# EAGLE board Gimbal Controler V3.0.1 by Martinez (EAGLE 6.3)
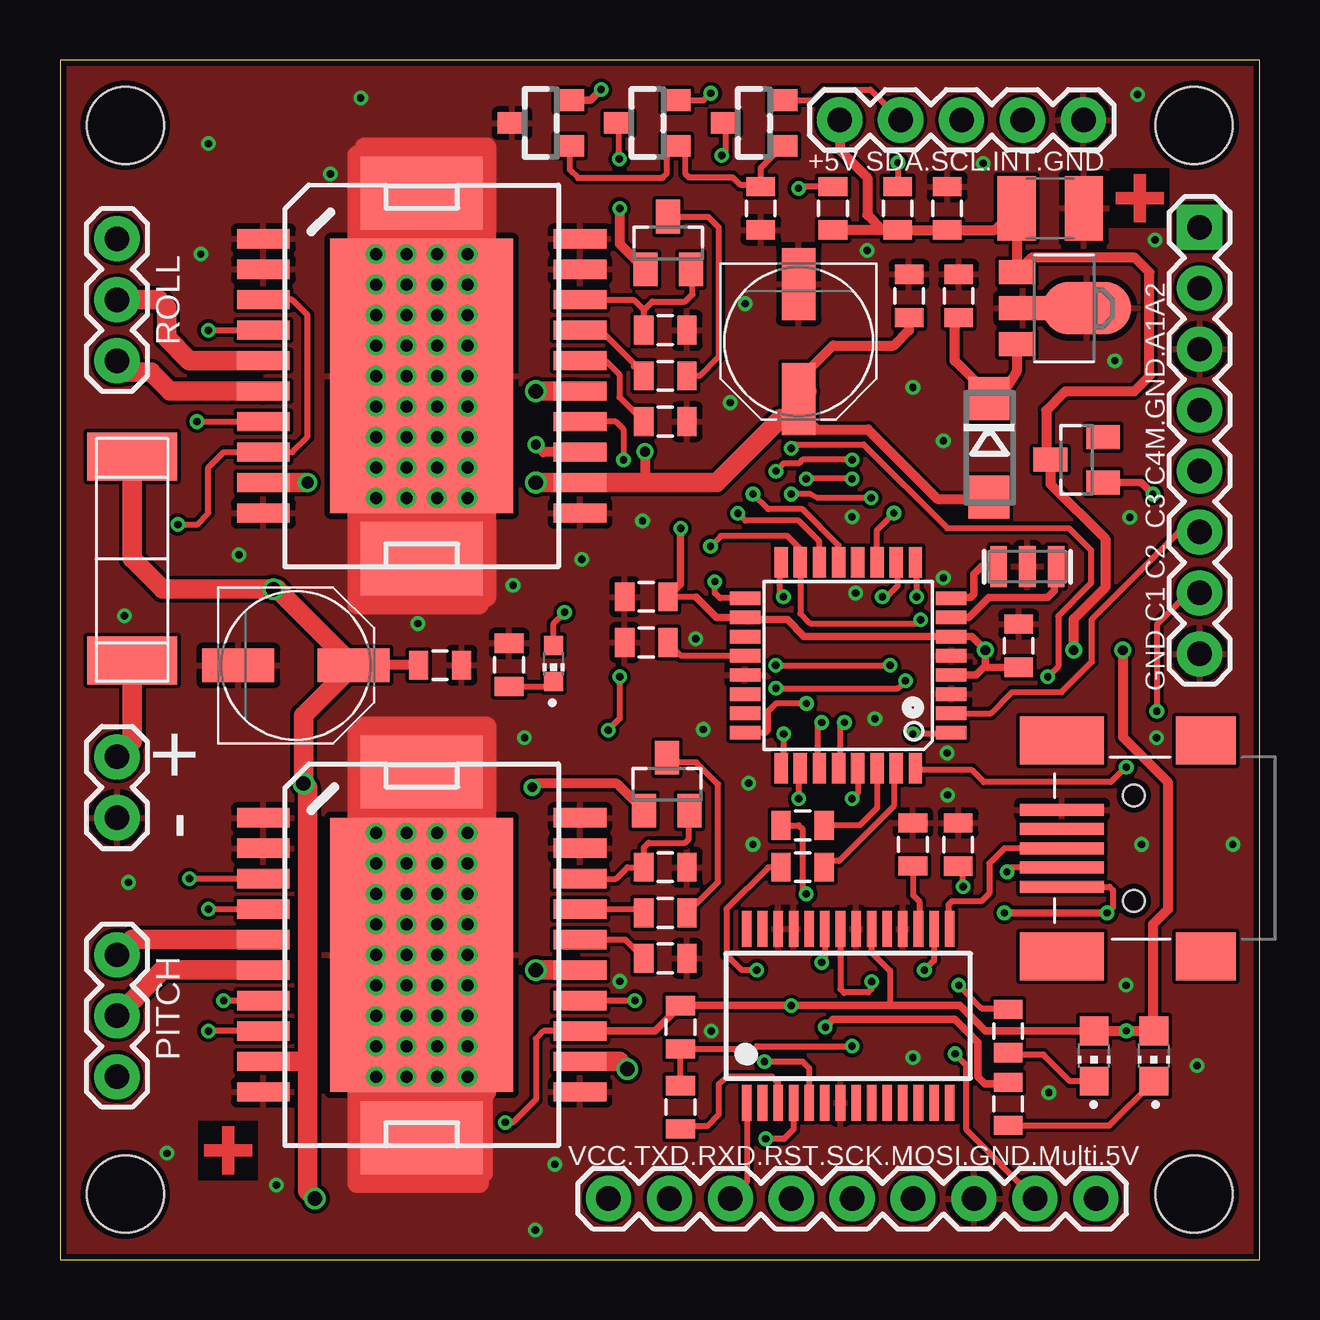
[diagram p0: board, top side]
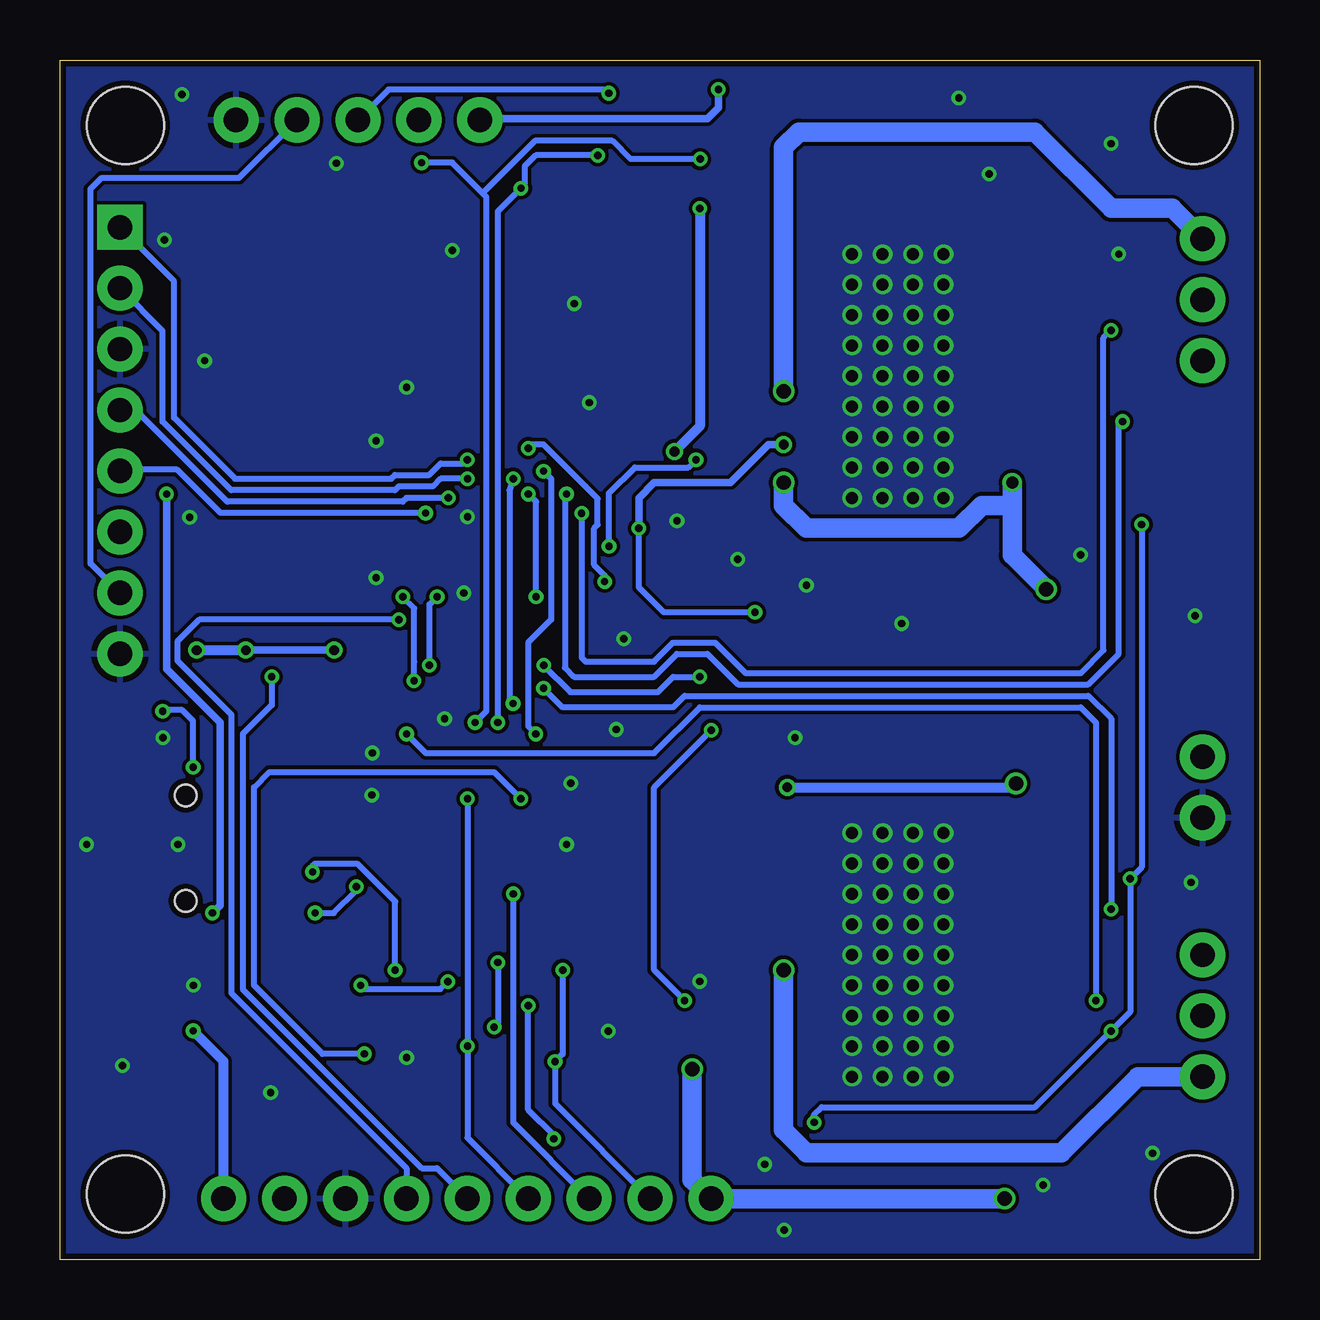
[diagram p1: board, bottom side, seen from below]

Size 50 x 50 mm. Coordinates in mm from the lower left corner, seen from the top.
Outline: 50,0 50,50 0,50 0,0 50,0
Copper layers (1*16): Top 0.035mm / dielectric 1.5mm / Bottom 0.035mm
Design rules "ITEADstudio_DRC *": minimum track width 6mil, minimum drill 12mil, track to track 6mil, track to pad 6mil, pad to pad 6mil, via to via 6mil, smd to smd 0mil, copper to edge 10mil, drill to drill 10mil, minimum pad ring 10mil, minimum via ring 6mil, stop-mask expansion 2mil, vias tented up to drill 100mil, thermal gap 10mil
Net classes: 0 default: width 0.152 mm, clearance 0.152 mm
Holes 3.2 mm at 47.27,2.73 2.73,2.73 2.73,47.27 47.27,47.27
tRestrict: 8 lines

## Footprints (pad centres in the part's own frame; a part is rotated, then mirrored left to right if it is on the bottom)
0805 = smd 0.8 x 1.2: 1 -0.9,0; 2 0.9,0
PANASONIC_D = smd 3 x 1.4: + 2.4,0; - -2.4,0
C1210 = smd 1.6 x 2.7: 1 -1.4,0; 2 1.4,0
TQFP32-08 = smd 1.27 x 0.559: 1 -4.293,2.8; 2 -4.293,2; 3 -4.293,1.2; 4 -4.293,0.4; 5 -4.293,-0.4; 6 -4.293,-1.2; 7 -4.293,-2; 8 -4.293,-2.8; 17 4.293,-2.8; 18 4.293,-2; 19 4.293,-1.2; 20 4.293,-0.4; 21 4.293,0.4; 22 4.293,1.2; 23 4.293,2; 24 4.293,2.8 | smd 0.559 x 1.27: 9 -2.8,-4.293; 10 -2,-4.293; 11 -1.2,-4.293; 12 -0.4,-4.293; 13 0.4,-4.293; 14 1.2,-4.293; 15 2,-4.293; 16 2.8,-4.293; 25 2.8,4.293; 26 2,4.293; 27 1.2,4.293; 28 0.4,4.293; 29 -0.4,4.293; 30 -1.2,4.293; 31 -2,4.293; 32 -2.8,4.293
SSOP28 = smd 0.4 x 1.5: 1 -4.225,-3.625; 2 -3.575,-3.625; 3 -2.925,-3.625; 4 -2.275,-3.625; 5 -1.625,-3.625; 6 -0.975,-3.625; 7 -0.325,-3.625; 8 0.325,-3.625; 9 0.975,-3.625; 10 1.625,-3.625; 11 2.275,-3.625; 12 2.925,-3.625; 13 3.575,-3.625; 14 4.225,-3.625; 15 4.225,3.625; 16 3.575,3.625; 17 2.925,3.625; 18 2.275,3.625; 19 1.625,3.625; 20 0.975,3.625; 21 0.325,3.625; 22 -0.325,3.625; 23 -0.975,3.625; 24 -1.625,3.625; 25 -2.275,3.625; 26 -2.925,3.625; 27 -3.575,3.625; 28 -4.225,3.625
SO20POWER2 = smd 0.8 x 2.2: 1 -5.715,-6.6; 2 -4.445,-6.6; 3 -3.175,-6.6; 4 -1.905,-6.6; 5 -0.635,-6.6; 6 0.635,-6.6; 7 1.905,-6.6; 8 3.175,-6.6; 9 4.445,-6.6; 10 5.715,-6.6; 11 5.715,6.6; 12 4.445,6.6; 13 3.175,6.6; 14 1.905,6.6; 15 0.635,6.6; 16 -0.635,6.6; 17 -1.905,6.6; 18 -3.175,6.6; 19 -4.445,6.6; 20 -5.715,6.6 | smd 3.048 x 5.08: SLUG -7.62,0; SLUG2 7.62,0 | smd 11.43 x 7.62: SLUG1 0,0
SOT23 = smd 1 x 1.4: 1 -0.95,-1.1; 2 0.95,-1.1; 3 0,1.1
SMD_FUSE_10MM = smd 2 x 3.75: P$1 4.25,0; P$2 -4.25,0
SOT23' = smd 0.9 x 1.2: 1 -0.95,-1.2; 2 0.95,-1.2; 3 0,1.2
1X02 = drill 1.016 pad 1.88: 1 0,0; 2 2.54,0
1X05 = drill 1.016 pad 1.88: 1 0,0; 2 2.54,0; 3 5.08,0; 4 7.62,0; 5 10.16,0
1X08 = drill 1.016 pad 1.88 square: 1 0,0 | drill 1.016 pad 1.88: 2 2.54,0; 3 5.08,0; 4 7.62,0; 5 10.16,0; 6 12.7,0; 7 15.24,0; 8 17.78,0
1X09 = drill 1.016 pad 1.88: 1 0,0; 2 2.54,0; 3 5.08,0; 4 7.62,0; 5 10.16,0; 6 12.7,0; 7 15.24,0; 8 17.78,0; 9 20.32,0
1X03 = drill 1.016 pad 1.88: 1 0,0; 2 2.54,0; 3 5.08,0
CHIP-LED0603 = smd 0.8 x 0.8: A 0,-0.75; C 0,0.75
CHIP-LED0805 = smd 1.2 x 1.2: A 0,-1.05; C 0,1.05
DO214AC = smd 1.8 x 1.7: A 2.05,0; C -2.05,0
SOT89 = smd 1 x 1.5: 1 -1.499,-1.981; 3 1.499,-1.981 | smd 1 x 2: 2 0,-1.727 | smd 2.2 x 3.7: 2@1 0,0.94
USB-MINIB-OLD = smd 2.5 x 2: 1 -3,-4.5; 2 -3,4.5 | smd 3.5 x 2: 3 3,-4.5; 4 3,4.5 | smd 3.5 x 0.5: D+ 3,0; D- 3,0.8; GND 3,-1.6; ID 3,-0.8; VBUS 3.01,1.61 | hole 0.9: 0,2.2; 0,-2.2
RESONATOR-SMD = smd 0.7 x 1.7: 1 -1.2,0; 2 0,0; 3 1.2,0

## Placement (x,y rotation side)
C1  100n  [0805]  35.55,17.3 90 top
C2  100n  [0805]  25.87,6.35 270 top
C3  100n  [0805]  36.98,43.81 270 top
C4  100n  [0805]  37.46,40.16 270 top
C5  100n  [0805]  24.44,27.62 180 top
C6  100µ  [PANASONIC_D]  9.84,24.77 0 top
C7  100µ  [PANASONIC_D]  30.79,38.26 270 top
C8  100n  [0805]  39.96,25.58 90 top
C9  47u  [C1210]  41.27,43.81 180 top
C10  100n  [0805]  29.21,43.81 270 top
C11  4.7u  [0805]  37.44,17.3 90 top
C16  1uF  [0805]  25.23,34.92 180 top
C17  1uF  [0805]  25.23,12.55 180 top
C18  10n  [0805]  25.23,14.45 180 top
C19  10n  [0805]  25.23,36.83 180 top
C20  220n  [0805]  25.23,16.35 0 top
C21  220n  [0805]  25.23,38.73 0 top
C24  100n  [0805]  35.4,40.16 90 top
C25  100n  [0805]  15.84,24.77 0 top
C29  100n  [0805]  24.44,25.72 0 top
D1  ATMEGA328p-AU  [TQFP32-08]  32.85,24.77 180 top
D2  FT232RL  [SSOP28]  32.85,10.16 0 top
D3  T1  [SO20POWER2]  15.07,12.7 270 top
D4  T2  [SO20POWER2]  15.07,36.83 270 top
D5  BAV99  [SOT23]  25.35,42.37 0 top
D6  BAV99  [SOT23]  25.3,19.81 0 top
F1  FUSE_SMD_10MM  [SMD_FUSE_10MM]  3.01,29.21 270 top
IC2  LM3480-3.3V  [SOT23']  20.04,47.37 90 top
JP1  [1X02]  2.38,18.41 90 top
JP2  [1X05]  32.5,47.5 0 top
JP3  [1X08]  47.5,43.03 270 top
JP4  M09  [1X09]  43.18,2.54 180 top
JP6  [1X03]  2.38,12.7 270 top
JP7  [1X03]  2.38,37.47 90 top
LED1  Blue LBL293  [CHIP-LED0603]  20.57,24.84 180 top
LED2  LG M67K green  [CHIP-LED0805]  43.1,8.48 180 top
LED3  LG M67K red  [CHIP-LED0805]  45.59,8.48 180 top
Q1  BSS138  [SOT23']  24.49,47.37 90 top
Q2  BSS138  [SOT23']  28.93,47.37 90 top
R1  4,7k  [0805]  32.22,43.81 270 top
R2  4,7k  [0805]  34.92,43.81 270 top
R3  1k  [0805]  30.95,18.1 0 top
R4  330R  [0805]  39.52,6.49 270 top
R5  330R  [0805]  39.52,9.53 270 top
R6  1k  [0805]  30.95,16.35 0 top
R7  220  [0805]  18.72,24.79 270 top
R21  10k  [0805]  25.87,9.68 90 top
V1  [DO214AC]  38.72,33.83 270 top
V2  ZHCS1000  [SOT23]  42.38,33.34 90 top
V7  78L05F  [SOT89]  41.87,39.65 270 top
X2  USBOLD  [USB-MINIB-OLD]  44.76,17.14 180 top
Y7  16mhz  [RESONATOR-SMD]  40.32,28.88 180 top

## Library data of the parts
C1-C8 C10 C11 C16-C21 C24 C25 C29 JP1-JP4 JP6 JP7 R1-R7 R21 X2 Y7 = SparkFun
C9 = rcl
D1 = Arduino-AVR
D2 = ftdichip; MPN: FT232RL; OC_FARNELL: 1146032; OC_NEWARK: 91K9918
D3 D4 = L6234
D5 D6 V1 V2 = diode
F1 = f-lf-omniblok-s
IC2 Q1 Q2 = m-pad-2.1_my
LED1-LED3 = led
V7 = linear

## Nets
3.3V: C10.1 IC2.1 Q1.1 Q2.1
+5V: C3.2 C5.1 C8.1 C9.2 D1.4 D1.6 D1.18 D2.4 D2.20 D3.3 D3.8 D3.13 D4.3 D4.8 D4.13 IC2.2 JP2.1 JP4.1 LED1.A LED2.A LED3.A R1.2 R2.2 R21.2 V2.3 V7.1
A1: D1.24 JP3.2
A2: D1.25 JP3.1
A7: D1.22
CBUS0: D2.23 R4.1
CBUS1: D2.22 R5.1
CH2: D1.2 JP3.6
CH3: D1.11 JP3.5
D0_RXD: D1.30 R3.2
D1_TXD: D1.31 R6.2
DMINUS: D2.16 X2.D-
DPLUS: D2.15 X2.D+
GND: C1.2 C3.1 C4.1 C5.2 C6.- C7.- C8.2 C9.1 C10.2 C11.2 C16.1 C17.1 C20.2 C21.2 C24.2 C25.2 C29.1 D1.3 D1.5 D1.21 D2.7 D2.18 D2.21 D2.25 D2.26 D3.1 D3.2 D3.10 D3.11 D3.19 D3.20 D3.SLUG D3.SLUG1 D3.SLUG2 D4.1 D4.2 D4.10 D4.11 D4.19 D4.20 D4.SLUG D4.SLUG1 D4.SLUG2 IC2.3 JP1.1 JP2.5 JP3.3 JP3.8 JP4.3 R7.1 V7.2 V7.2@1 X2.GND Y7.2
INT: D1.32 JP2.4 JP3.7
LED: D1.12
MISO: D1.16 JP3.4
MOSI/PWM6: D1.15 D4.14 JP4.4
MULTI_PORT: D1.26 JP4.2
N$1: LED3.C R4.2
N$2: LED2.C R5.2
N$3: F1.P$1 JP1.2
N$4: LED1.C R7.2
N$7: C16.2 D4.16
N$8: C17.2 D3.16
N$17: C18.2 D3.17
N$18: C19.2 D4.17
N$19: C19.1 D5.3
N$20: C21.1 D4.18 D5.2
N$21: D3.15 JP6.3
N$22: C1.1 D2.17
N$23: D4.6 JP7.1
N$24: D4.5 JP7.2
N$25: D4.15 JP7.3
N$26: C2.2 D2.3
N$27: D3.5 JP6.1
N$28: D3.6 JP6.2
N$38: D1.8 Y7.3
N$39: D1.7 Y7.1
N$40: C29.2 D1.20
PWM1: D1.1 D3.7
PWM2: D1.9 D3.4
PWM3: D1.10 D3.14
PWM4: D1.13 D4.7
PWM5: D1.14 D4.4
RESET: C2.1 D1.29 JP4.6 R21.1
RXD: D2.1 JP4.7 R3.1
SCK_EN: D1.17 JP4.5
SCL: D1.28 Q1.3 R2.1
SCL_3V: JP2.3 Q1.2
SDA: D1.27 Q2.3 R1.1
SDA_3V: JP2.2 Q2.2
TXD: D2.5 JP4.8 R6.1
VBOOT1: C20.1 D3.18 D6.2
VBUS: C11.1 V2.1 X2.VBUS
VCC: C6.+ C7.+ C24.1 C25.1 D3.9 D3.12 D4.9 D4.12 D5.1 D6.1 F1.P$2 JP4.9 V1.A
VCC_VI: C4.2 V1.C V7.3
VCP1: C18.1 D6.3

## Tracks (layer width: path | path; a pad name or v marks a point on that pad's centre or on a via)
3.3V
  Top 0.254: IC2.1 21.24,45.43 21.59,45.09 25.12,45.09 25.3,45.26 25.3,46.03 Q1.1 25.82,46.42 26.06,46.18 26.06,45.26 26.21,45.11 28.04,45.11 28.35,44.81 29.12,44.81 C10.1 29.21,45.5 Q2.1
+5V  (via drill 0.3, 0.41)
  Top 0.254: 28.63,26.83 D1.18 | D4.3 9.68,40.01 10.31,39.37 10.31,34.29 9.68,33.66 D4.8 6.82,33.66 6.18,33.02 6.18,31.11 5.71,30.64 v4.92,30.64 | D3.13 20.16,9.53 19.84,9.21 19.84,6.67 18.89,5.71 v18.57,5.71 | D3.8 v6.18,9.53 | D3.3 v5.39,15.88 | 26.5,27.62 C5.1 25.4,27.68 | LED1.A 20.57,26.52 v21.03,26.98 | D2.20 33.83,12.8 34.59,12.04 34.59,10.58 | 29.57,5.03 v29.41,5.03 30.18,5.03 30.58,5.43 D2.4
  Top 0.305: D1.4 38.17,24.36 38.57,24.77 | 38.57,24.77 v38.57,25.4 38.01,25.96 D1.6 31.02,25.96 30.32,26.67 28.66,26.67 | D1.18 27.36,26.77 26.5,27.62 | D3.13 24.81,9.53 R21.2 v30.48,10.58 34.59,10.58 37.51,10.58 38.57,9.53 43.02,9.53 | IC2.2 22.11,48.32 v22.55,48.77 | C8.1 38.65,24.68 38.57,24.77 | v25.87,30.48 25.87,28.15 C5.1
  Top 0.406: D4.13 20.16,33.66 v19.84,33.97 | 28.66,26.67 D1.18 | V2.3 41.11,33.51 41.11,35.4 41.91,36.2 44.78,36.2 45.41,36.83 45.41,41.15 44.81,41.76 40.49,41.76 V7.1 39.88,41.46 C9.2 38.98,42.91 C3.2 R2.2 34.29,42.91 | 41.11,33.17 V2.3 | v44.3,25.4 44.3,21.77 46.19,19.89 46.19,14.61 45.55,13.97 45.55,9.57 LED3.A v44.45,9.53 LED2.A 43.02,9.53 | 34.29,42.91 R1.2 | JP2.1 32.5,46.24 33.66,45.09 33.66,43.55 34.29,42.91 | v42.25,25.4 42.25,26.71 43.59,28.04 43.59,30.02 41.3,32.31 41.3,33.32 V2.3
  Bottom 0.254: v4.92,30.64 4.92,16.35 v5.39,15.88 5.39,10.32 v6.18,9.53 9.36,6.35 18.25,6.35 18.57,6.03 v18.57,5.71 | 38.73,25.24 v38.57,25.4 | v21.03,26.98 24.83,26.98 25.87,28.02 v25.87,30.48 | v29.41,5.03 29.41,5.18 30.48,6.25 v30.48,10.58
  Bottom 0.305: v38.57,25.4 v42.25,25.4 | v19.84,33.97 20.47,33.97 22.06,32.38 25.23,32.38 25.87,31.75 v25.87,30.48 | v22.55,48.77 22.55,48.01 23.01,47.55 32.45,47.55 JP2.1
  Bottom 0.406: v44.3,25.4 v42.25,25.4 | JP4.1 43.18,8.26 v44.45,9.53
A1  (via drill 0.3)
  Top 0.254: v33.01,32.54 v31.11,32.54 | 28.66,22.07 D1.24 29.43,21.96 29.53,22.07 29.53,22.86 29.84,23.18 v31.11,23.18
  Bottom 0.254: v31.11,32.54 31.27,32.07 31.27,23.33 v31.11,23.18 | v33.01,32.54 34.13,32.54 34.45,32.23 35.88,32.23 36.04,32.07 42.86,32.07 45.72,34.92 45.72,38.71 JP3.2
A2  (via drill 0.3)
  Top 0.254: v33.02,33.34 30.96,33.34 30.8,33.18 30.16,33.18 v29.84,32.86 | v30.16,21.91 30.16,20.58 D1.25
  Bottom 0.254: v33.02,33.34 33.18,33.18 34.13,33.18 34.61,32.7 36.04,32.7 36.2,32.54 42.7,32.54 45.24,35.08 45.24,40.77 JP3.1 | v29.84,32.86 29.53,32.54 29.53,26.67 30.48,25.72 30.48,22.23 v30.16,21.91
CBUS0  (via drill 0.3)
  Top 0.254: D2.23 31.88,12.52 v31.74,12.38
  Top 0.305: v31.9,9.68 32.22,10 37.3,10 38.25,9.05 38.25,7.62 38.56,7.32 39.45,7.32 R4.1
  Bottom 0.254: v31.74,12.38 31.74,9.84 v31.9,9.68
CBUS1  (via drill 0.3)
  Top 0.254: D2.22 32.53,11.28 32.7,11.11 32.71,11.12 33.68,11.12 33.83,11.28 v33.83,11.58 | R5.1 39.47,10.48 38.41,10.48 37.78,11.11 37.78,11.12 v37.47,11.43
  Bottom 0.254: v37.47,11.43 37.47,11.4 37.34,11.28 34.14,11.28 v33.83,11.58
CH2
  Top 0.254: D1.2 38.79,22.77 39.68,23.65 41.74,23.65 43.02,24.92 43.02,26.71 46.63,30.33 JP3.6
CH3  (via drill 0.3)
  Top 0.254: D1.11 34.05,30.41 v34.76,31.11
  Bottom 0.254: v34.76,31.11 43.31,31.11 45.11,32.92 47.45,32.92 JP3.5
D0_RXD
  Top 0.254: D1.30 34.05,18.82 33.33,18.1 R3.2
D1_TXD
  Top 0.254: D1.31 34.85,20.41 34.76,20.32 34.76,18.91 32.46,16.61 32.11,16.61 R6.2
DMINUS  (via drill 0.3)
  Top 0.254: D2.16 36.43,12.46 v36.03,12.06 | X2.D- 39.66,16.34 v39.47,16.15
  Bottom 0.254: v36.03,12.06 36.03,14.92 37.62,16.51 39.37,16.51 39.47,16.41 v39.47,16.15
DPLUS
  Top 0.254: D2.15 37.03,13.83 37.03,14.78 37.19,14.94 38.41,14.94 38.73,15.27 38.73,16.51 39.37,17.14 X2.D+
GND  (via drill 0.3, 0.5)
  Top 0.508: 17.78,6.99 17.78,3.49
  Top 0.813: 12.7,46.35 17.78,46.35 17.78,42.55 12.38,42.55 12.38,46.04 | 17.46,27.3 12.38,27.3 12.38,31.11 17.78,31.11 17.78,27.62 | 12.7,22.23 17.78,22.23 17.78,18.41 12.38,18.41 12.38,21.91 | 17.46,3.17 12.38,3.17 12.38,6.99 17.78,6.99
  other vias: 4.46,4.43 44.92,48.56 13.17,12.7 13.17,11.43 13.17,10.16 13.17,8.89 13.17,7.62 14.44,7.62 14.44,8.89 14.44,10.16 14.44,11.43 14.44,12.7 15.71,10.16 15.71,8.89 15.71,7.62 16.98,7.62 16.98,8.89 16.98,10.16 15.71,11.43 15.71,12.7 16.98,12.7 16.98,11.43 15.71,13.97 15.71,15.24 15.71,16.51 15.71,17.78 13.17,13.97 13.17,15.24 13.17,16.51 13.17,17.78 14.44,13.97 14.44,15.24 14.44,16.51 14.44,17.78 16.98,13.97 16.98,15.24 16.98,16.51 16.98,17.78 13.17,35.56 13.17,34.29 13.17,33.02 13.17,31.75 14.44,31.75 14.44,33.02 14.44,34.29 14.44,35.56 15.71,34.29 15.71,33.02 15.71,31.75 16.98,31.75 16.98,33.02 16.98,34.29 15.71,35.56 16.98,35.56 13.17,41.91 13.17,40.64 13.17,39.37 13.17,38.1 14.44,38.1 14.44,39.37 14.44,40.64 14.44,41.91 15.71,40.64 15.71,39.37 15.71,38.1 16.98,38.1 16.98,39.37 16.98,40.64 15.71,41.91 16.98,41.91 13.17,36.83 14.44,36.83 15.71,36.83 16.98,36.83 28.57,39.85 36.82,34.13 33.97,22.54 35.55,36.35 28.71,19.86 26.5,25.88 23.34,11.6 28.89,17.3 14.92,26.51 33.01,30.96 36.82,28.42 27.93,35.72 33.65,42.07 33.17,27.78 37,19.36 45.08,17.3 45.71,21.75 35.55,8.41 27.14,9.53 21.76,29.18 24.28,30.8 2.85,15.72 2.69,26.83 5.87,41.91 6.18,46.51 36.98,21.11 44.44,11.43 43.97,37.47 41.22,6.96 12.54,48.42 11.27,45.24 7.46,29.37 18.89,28.1 19.36,21.75 20.63,3.97 9.02,3.11 19.82,1.23 47.39,8.08 44.6,30.94 38.48,45.69 45.64,42.49 26.81,22.09 48.89,17.3
  pour Top: 0.25,0.25 0.25,49.75 49.75,49.75 49.75,0.25
  pour Bottom: 0.25,0.25 0.25,49.75 49.75,49.75 49.75,0.25
INT  (via drill 0.3)
  Top 0.152: 35.56,20.32 D1.32 | 35.56,20.32 D1.32 | 35.56,20.32 D1.32 | 35.56,20.32 D1.32 | 35.56,20.32 D1.32 | 35.56,20.32 D1.32 | 35.56,20.32 35.6,20.3
  Top 0.254: v45.72,22.86 45.72,26.47 46.99,27.74 JP3.7 | v44.45,20.52 44.22,20.32 43.8,19.9 38.5,19.9 38,20.4 35.7,20.4
  Top 0.305: 35.7,20.4 35.6,20.3
  Bottom 0.254: JP3.7 48.7,28.99 48.73,28.99 48.73,44.62 48.26,45.09 42.53,45.09 JP2.4 | v44.45,20.52 44.45,22.45 44.9,22.9 45.68,22.9 v45.72,22.86
MISO  (via drill 0.3)
  Top 0.254: D1.16 30,29.11 30,27.78 v30.16,27.62 | v33.81,31.75 31.59,31.75 31.27,31.91 v30.47,31.91
  Bottom 0.254: v30.16,27.62 30.16,31.59 v30.47,31.91 | v33.81,31.75 35.56,31.75 35.72,31.59 43.02,31.59 46.63,35.2 47.3,35.2 JP3.4
MOSI/PWM6  (via drill 0.3)
  Top 0.254: D4.14 23.17,34.92 23.49,34.61 v23.49,33.34 | v35.87,26.67 35.71,26.51 31.27,26.51 30.86,26.92 D1.15 30.86,29.62 30.32,30.16 27.55,30.16 v27.11,29.73
  Bottom 0.254: v35.87,26.67 44.2,26.67 45.11,25.76 45.11,24.97 42.86,22.71 42.86,11.11 35.56,3.81 JP4.4 | v27.11,29.73 27.11,31.94 26.04,33.02 23.81,33.02 v23.49,33.34
MULTI_PORT  (via drill 0.3 pad 0.25)
  Top 0.254: 30.79,20.41 D1.26 30.8,20.41 v30.8,19.21 | JP4.2 37.78,5.4 37.78,8.1 v37.31,8.57
  Bottom 0.254: v37.31,8.57 39.05,8.57 41.91,11.43 41.91,19.68 41.27,20.32 31.91,20.32 v30.8,19.21
N$1
  Top 0.254: R4.2 43.75,5.59 LED3.C
N$2
  Top 0.254: LED2.C 42.1,7.43 41,8.53 39.61,8.53 R5.2
N$3
  Top 0.813: F1.P$1 3.01,21.59 JP1.2
N$4
  Top 0.254: R7.2 20.37,23.89 LED1.C
N$7
  Top 0.254: D4.16 22.73,37.47 23.32,36.88 23.32,35.94 C16.2
N$8
  Top 0.254: D3.16 23.55,13.34 C17.2
N$17
  Top 0.254: D3.17 24.18,14.61 C18.2
N$18
  Top 0.254: D4.17 22.53,38.73 23.93,37.34 23.93,37.24 C19.2
N$19
  Top 0.254: D5.3 27.02,43.47 27.46,43.03 27.46,37.62 26.67,36.83 C19.1
N$20
  Top 0.254: D4.18 23.91,40.01 24.34,39.58 | C21.1 24.34,39.58 | 24.34,39.58 24.69,39.93 26.06,39.93 26.36,40.23 26.36,41.2 D5.2
N$21  (via drill 0.6)
  Top 0.813: D3.15 v19.84,12.06
  Bottom 0.813: v19.84,12.06 19.84,5.4 18.89,4.45 8.26,4.45 5.08,7.62 JP6.3
N$22
  Top 0.254: C1.1 35.55,15.2 35.81,14.94 35.81,13.82 D2.17
N$23
  Top 0.813: D4.6 4.6,36.2 3.8,36.99 2.85,36.99 JP7.1
N$24
  Top 0.813: D4.5 5.39,37.47 4.44,38.42 4.44,39.69 4.12,40.01 JP7.2
N$25  (via drill 0.6)
  Top 0.813: D4.15 v19.84,36.2
  Bottom 0.813: v19.84,36.2 19.84,46.35 19.2,46.99 9.36,46.99 6.18,43.81 3.65,43.81 JP7.3
N$26
  Top 0.254: D2.3 29.93,7.37 29.68,7.62 27.77,7.62 27.46,7.3 27.46,6.03 26.98,5.56 25.98,5.56 C2.2
N$27
  Top 0.813: D3.5 3.01,13.34 JP6.1
N$28
  Top 0.813: D3.6 4.28,12.06 JP6.2
N$38
  Top 0.305: Y7.3 38.41,28.88 38.1,28.57 38.1,27.74 37.95,27.58 37.17,27.58 D1.8
N$39
  Top 0.305: D1.7 37.89,26.77 38.71,27.58 41.15,27.58 41.45,27.89 41.45,28.81 Y7.1
N$40
  Top 0.254: D1.20 25.89,25.16 C29.2
PWM1  (via drill 0.3)
  Top 0.254: 8.32,10.95 D3.7 v6.82,10.79 | D1.1 37.09,21.91 v35.55,21.91
  Bottom 0.254: v6.82,10.79 6.82,22.38 7.46,23.02 23.33,23.02 25.23,21.11 34.76,21.11 v35.55,21.91
PWM2  (via drill 0.3)
  Top 0.254: v6.18,14.61 D3.4 | v35.71,27.62 35.71,29 D1.9 | v29.84,23.81 34.92,23.81 v35.24,24.13
  Bottom 0.254: v6.18,14.61 6.18,22.54 7.14,23.5 23.96,23.5 24.44,23.02 29.05,23.02 v29.84,23.81 | v35.71,27.62 35.24,27.15 35.24,24.92 v35.24,24.13
PWM3  (via drill 0.3)
  Top 0.254: D3.14 v23.96,10.79 | v29.84,24.77 v34.6,24.77 | 34.76,28.96 D1.10 34.92,28.99 34.92,28.1 34.44,27.62 v34.28,27.62 | v23.33,24.29 23.33,22.54 v22.85,22.07
  Bottom 0.254: v23.96,10.79 25.23,12.06 25.23,19.68 v22.85,22.07 | v23.33,24.29 24.44,24.29 25.08,23.65 28.73,23.65 v29.84,24.77 | v34.6,24.77 34.6,27.3 v34.28,27.62
PWM4  (via drill 0.3)
  Top 0.254: D1.13 32.45,29.77 30.95,31.27 29.52,31.27 v28.89,31.91 | v5.71,34.92 D4.7
  Bottom 0.254: v5.71,34.92 5.87,34.77 5.87,25.24 7.14,23.97 21.74,23.97 23.01,25.24 24.28,25.24 25.23,24.29 28.57,24.29 28.96,24.68 28.96,31.85 v28.9,31.91 v28.89,31.91
PWM5  (via drill 0.3)
  Top 0.254: v6.18,38.73 D4.4 | D1.14 31.66,29.93 30.79,30.8 28.57,30.8 v28.26,31.11
  Bottom 0.254: v6.18,38.73 6.5,38.42 6.5,25.4 7.46,24.45 21.43,24.45 22.7,25.72 24.44,25.72 25.23,24.92 28.09,24.92 28.26,25.09 v28.26,31.11
RESET  (via drill 0.3)
  Top 0.254: D1.29 33.26,19.45 v33.01,19.21 | C2.1 R21.1 28.94,8.78 29.05,8.89 v33.01,8.89
  Bottom 0.254: v33.01,19.21 v33.01,8.89 33.01,5.07 JP4.6
RXD  (via drill 0.3)
  Top 0.254: R3.1 30.79,18.1 30.95,17.94 30.95,15.4 v31.11,15.24 | D2.1 28.63,3.23 JP4.7
  Bottom 0.254: v31.11,15.24 31.11,5.71 JP4.7
SCK_EN  (via drill 0.3)
  Top 0.254: D1.17 27.52,27.57 27.3,27.78 v27.3,28.26 | v30.48,33.81 30.64,33.97 33.49,33.97 36.98,30.48 42.06,30.48 42.98,29.57 42.98,28.19 41.6,26.82 41.6,24.72 v41.17,24.29 41.15,24.31
  Bottom 0.254: v30.48,33.81 30.32,33.97 29.84,33.97 28.1,32.23 28.09,32.23 27.58,31.72 27.58,30.63 27.74,30.48 27.74,28.96 27.3,28.52 v27.3,28.26 | JP4.5 34.29,3.81 34.92,3.81 42.38,11.27 42.38,21.91 41.17,23.11 v41.17,24.29
SCL  (via drill 0.3)
  Top 0.254: D1.28 32.54,20.55 32.54,22.23 v32.7,22.38 | 34.92,44.84 R2.1 34.92,45.09 v34.92,45.72 | Q1.3 23.29,45.9 v23.32,45.87
  Bottom 0.254: v32.7,22.38 32.22,22.86 32.22,44.28 32.38,44.45 | v23.32,45.87 26.21,45.87 26.98,46.63 30.2,46.63 32.38,44.45 | 32.38,44.45 33.66,45.72 v34.92,45.72
SCL_3V  (via drill 0.3)
  Top 0.254: Q1.2 26.83,48.32 v27.13,48.62
  Bottom 0.254: v27.13,48.62 27.28,48.77 36.31,48.77 JP2.3
SDA  (via drill 0.3)
  Top 0.254: D1.27 31.59,20.54 31.59,22.23 v31.74,22.38 | Q2.3 27.73,46.17 v27.58,46.02 | R1.1 30.85,44.72 v30.79,44.65
  Bottom 0.254: v31.74,22.38 31.74,43.69 v30.79,44.65 30.63,44.81 30.63,45.57 30.18,46.02 v27.58,46.02
SDA_3V
  Top 0.254: Q2.2 31.41,48.32 31.85,48.77 33.77,48.77 JP2.2
TXD  (via drill 0.3)
  Top 0.254: R6.1 29.52,16.35 27.77,14.61 27.77,12.7 28.41,12.06 v29.05,12.06 | v29.36,8.26 30.95,8.26 31.23,7.97 D2.5
  Bottom 0.254: v29.05,12.06 29.05,8.57 v29.36,8.26 29.36,6.5 JP4.8
VBOOT1
  Top 0.254: D3.18 23.17,15.88 23.65,16.35 C20.1 24.34,17.17 24.54,17.37 26.06,17.37 26.21,17.53 26.21,18.68 D6.2
VBUS  (via drill 0.3)
  Top 0.254: X2.VBUS 43.75,15.54 43.89,15.39 43.89,14.69 v43.65,14.45 | v37.64,15.54 37.64,16.19 C11.1
  Top 0.305: v43.65,14.45 v39.36,14.45 | V2.1 45.08,32.38 v45.55,31.91
  Bottom 0.254: v39.36,14.45 38.59,14.45 37.64,15.39 v37.64,15.54
  Bottom 0.305: v45.55,31.91 45.55,24.61 43.33,22.38 43.33,14.76 v43.65,14.45
VCC  (via drill 0.3, 0.41, 0.5, 0.6)
  Top 0.406: 31.13,36.2 31.13,37.01 32.22,38.1 34.76,38.1 35.4,38.73 C24.1 | C25.1 C6.+ | C7.+ 30.79,35.35 31.55,34.59 33.68,34.59 36.58,31.7 38.64,31.7 V1.A | v24.38,33.68 24.38,32.64 24.13,32.38 | v23.33,43.81 23.33,42.34 D5.1 | D6.1 23.22,19.84 19.84,19.84 v19.68,19.68
  Top 0.813: D3.9 10.31,8.26 | D4.9 v10.31,32.38 | v19.84,32.38 D4.12 24.13,32.38 27.36,32.38 30.02,35.05 30.49,35.05 30.79,35.35 | 10.31,8.26 10.31,19.68 v10.15,19.84 10.15,22.68 C6.+ | 10.31,8.26 10.31,2.86 v10.63,2.54 | D3.12 23.33,8.26 v23.65,7.94 | F1.P$2 3.01,29.21 4.28,27.94 v8.89,27.94 9.06,27.94 C6.+ | C6.+ 12.24,25.06 | 31.13,36.2 C7.+
  Bottom 0.406: v23.33,43.81 23.33,34.73 v24.38,33.68 | v19.68,19.68 10.31,19.68 v10.15,19.84
  Bottom 0.813: v19.84,32.38 19.84,31.43 18.89,30.48 12.54,30.48 11.58,31.43 10.31,31.43 | v10.31,32.38 10.31,31.43 | v10.63,2.54 JP4.9 23.65,3.33 v23.65,7.94 | 10.31,31.43 10.31,29.36 v8.89,27.94
VCC_VI
  Top 0.406: C4.2 37.3,39.1 37.3,37.47 38.42,36.34 V1.C 39.03,36.2 39.37,36.2 39.88,37.01 V7.3
VCP1
  Top 0.254: D6.3 25.48,20.73 26.52,20.73 27.43,19.81 27.43,15.75 C18.1
(copper drawn outside any net)
  shapes: Top area x4

## Text on the board
tNames: +5V SDA.SCL.INT.GND | ROLL | GND C1 C2 C3 C4M.GND.A1A2 | + | - | PITCH | VCC.TXD.RXD.RST.SCK.MOSI.GND.Multi.5V
tStop: M | K | : | ) | by Martinez | FPV-Community
bStop: Brushlessgimbal.de